# EAGLE board PCB (EAGLE 6.5.0)
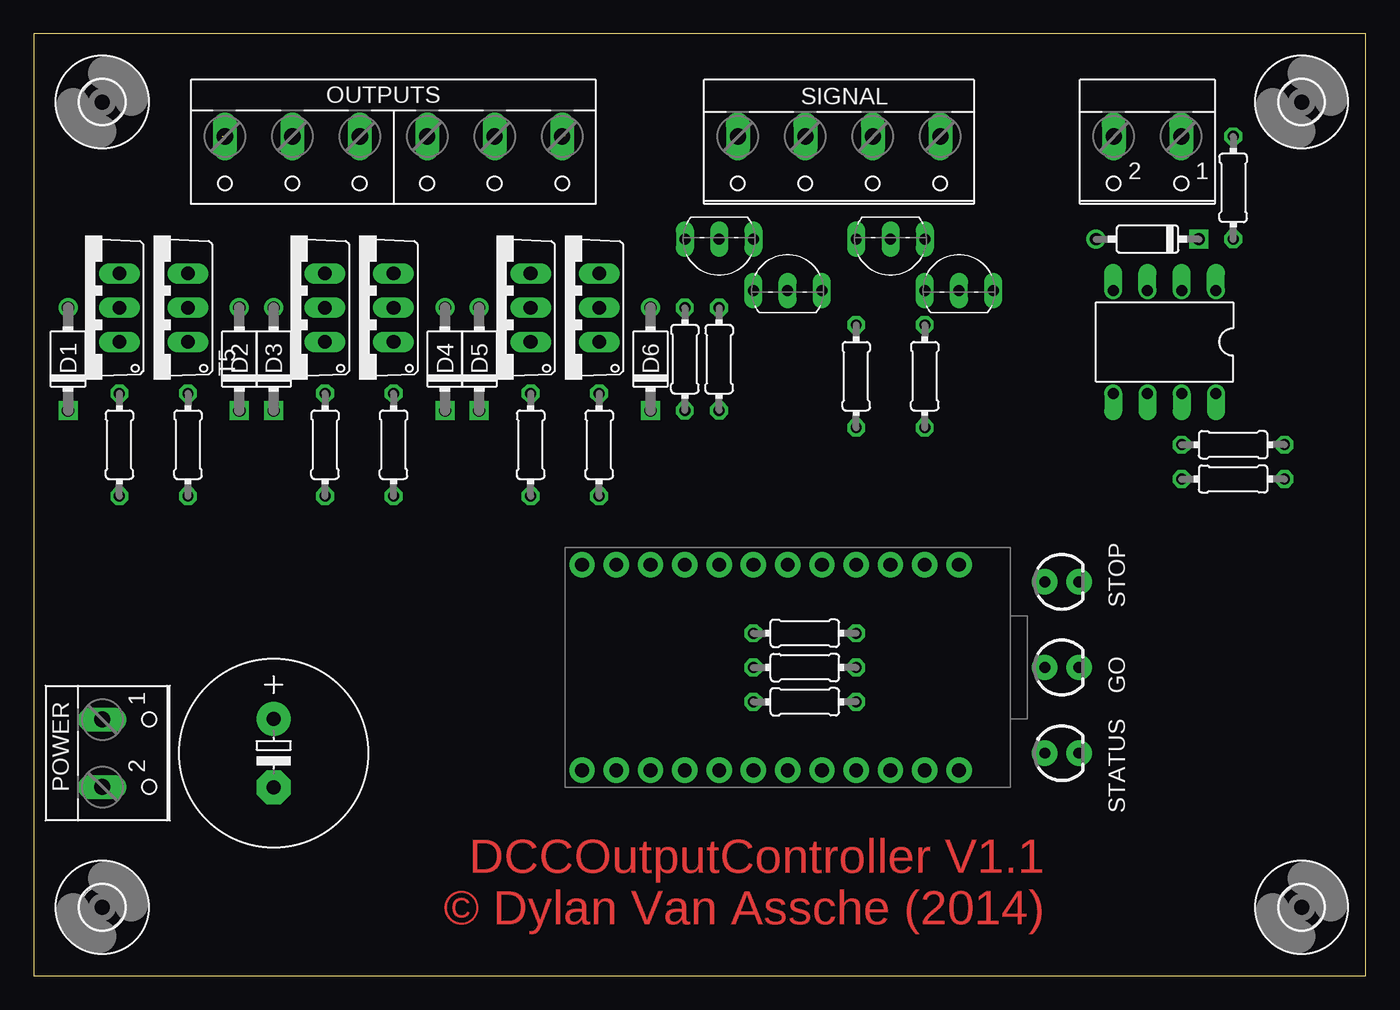
[diagram p0: board, top side]
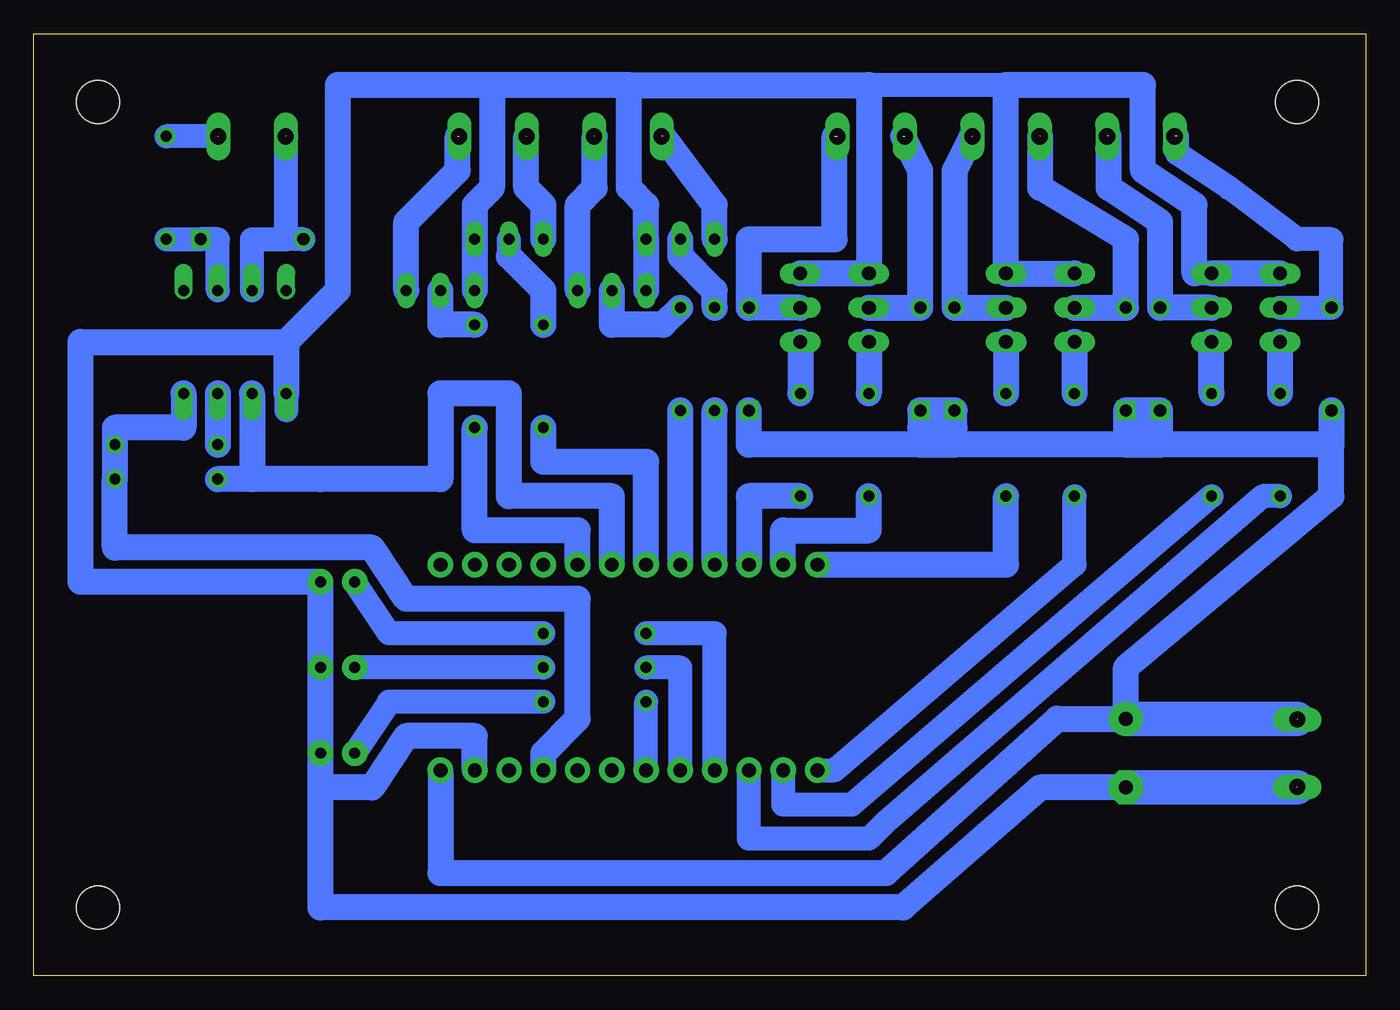
[diagram p1: board, bottom side, seen from below]

Size 98.73 x 69.84 mm. Coordinates in mm from the lower left corner, seen from the top.
Outline: 0,0 98.73,0 98.73,69.84 0,69.84 0,0
Copper layers (1*16): Top 0.035mm / dielectric 1.5mm / Bottom 0.035mm
Design rules "default": minimum track width 10mil, minimum drill 24mil, track to track 8mil, track to pad 8mil, pad to pad 8mil, via to via 8mil, smd to smd 8mil, copper to edge 40mil, drill to drill 8mil, minimum pad ring 10mil, minimum via ring 8mil, stop-mask expansion 4mil, vias tented up to drill 0mil, thermal gap 10mil

## Footprints (pad centres in the part's own frame; a part is rotated, then mirrored left to right if it is on the bottom)
E5-13 = drill 1.016 pad 2.54: + -2.54,0 | drill 1.016 pad 2.54 octagon: - 2.54,0
DO41-3 = drill 0.9: A 3.81,0 | drill 0.9 square: C -3.81,0
DO35-3 = drill 0.9: A 3.81,0 | drill 0.9 square: C -3.81,0
LED3MM = drill 0.813 pad 1.88: A -1.27,0; K 1.27,0
DIL08 = drill 0.813 offset: 1 -3.81,-3.81; 2 -1.27,-3.81; 3 1.27,-3.81; 4 3.81,-3.81; 5 3.81,3.81; 6 1.27,3.81; 7 -1.27,3.81; 8 -3.81,3.81
W237-6 = drill 1.194 long: 1 -12.5,-1.27; 2 -7.5,-1.27; 3 -2.5,-1.27; 4 2.5,-1.27; 5 7.5,-1.27; 6 12.5,-1.27
W237-102 = drill 1.194 long: 1 -2.5,-1.27; 2 2.5,-1.27
0204/7 = drill 0.813 octagon: 1 -3.81,0; 2 3.81,0
W237-4 = drill 1.194 long: 1 -7.5,-1.27; 2 -2.5,-1.27; 3 2.5,-1.27; 4 7.5,-1.27
TO220AV = drill 1.016 long: B -2.54,-2.54; C 0,-2.54; E 2.54,-2.54
TO92-EBC = drill 0.813 long: B 0,-1.27; C 2.54,-1.27; E -2.54,-1.27
ARDUINO_PRO_MICRO = drill 1.016 pad 1.88: 1 -7.62,12.7; 2 -7.62,10.16; 3 -7.62,7.62; 4 -7.62,5.08; 5 -7.62,2.54; 6 -7.62,0; 7 -7.62,-2.54; 8 -7.62,-5.08; 9 -7.62,-7.62; 10 -7.62,-10.16; 11 -7.62,-12.7; 12 -7.62,-15.24; 13 7.62,-15.24; 14 7.62,-12.7; 15 7.62,-10.16; 16 7.62,-7.62; 17 7.62,-5.08; 18 7.62,-2.54; 19 7.62,0; 20 7.62,2.54; 21 7.62,5.08; 22 7.62,7.62; 23 7.62,10.16; 24 7.62,12.7
3,2 = hole 3.2: 0,0

## Placement (x,y rotation side)
C1  1000uF  [E5-13]  17.78,16.51 270 top
D1  [DO41-3]  2.54,45.72 90 top
D2  [DO41-3]  15.24,45.72 90 top
D3  [DO41-3]  17.78,45.72 90 top
D4  [DO41-3]  30.48,45.72 90 top
D5  [DO41-3]  33.02,45.72 90 top
D6  [DO41-3]  45.72,45.72 90 top
D7  1N4148  [DO35-3]  82.55,54.61 180 top
GO  GREEN  [LED3MM]  76.2,22.86 0 top
OK1  6N137  [DIL08]  83.82,46.99 180 top
OUTPUTS  [W237-6]  26.67,60.96 180 top
POWER  [W237-102]  6.35,16.51 270 top
R1  1K  [0204/7]  66.04,44.45 270 top
R2  1K  [0204/7]  60.96,44.45 270 top
R3  1K  [0204/7]  50.8,45.72 270 top
R4  1K  [0204/7]  48.26,45.72 270 top
R5  1K  [0204/7]  41.91,39.37 270 top
R6  1K  [0204/7]  36.83,39.37 270 top
R7  1K  [0204/7]  26.67,39.37 270 top
R8  1K  [0204/7]  21.59,39.37 270 top
R9  1K  [0204/7]  11.43,39.37 270 top
R10  1K  [0204/7]  6.35,39.37 270 top
R11  1K  [0204/7]  88.9,58.42 90 top
R12  10K  [0204/7]  88.9,36.83 180 top
R13  10K  [0204/7]  88.9,39.37 180 top
R14  220  [0204/7]  57.15,20.32 0 top
R15  220  [0204/7]  57.15,22.86 0 top
R16  220  [0204/7]  57.15,25.4 0 top
SIGNAL  [W237-4]  59.69,60.96 180 top
STATUS  YELLOW  [LED3MM]  76.2,16.51 0 top
STOP  RED  [LED3MM]  76.2,29.21 0 top
T1  [TO220AV]  39.37,49.53 90 top
T2  [TO220AV]  34.29,49.53 90 top
T3  [TO220AV]  24.13,49.53 90 top
T4  [TO220AV]  19.05,49.53 90 top
T5  [TO220AV]  8.89,49.53 90 top
T6  [TO220AV]  3.81,49.53 90 top
T8  2N2222  [TO92-EBC]  55.88,52.07 0 top
T9  2N2222  [TO92-EBC]  63.5,53.34 180 top
T10  2N2222  [TO92-EBC]  68.58,52.07 0 top
T11  2N2222  [TO92-EBC]  50.8,53.34 180 top
U$1  ARDUINO_PRO_MICRO  [ARDUINO_PRO_MICRO]  55.88,22.86 270 top
U$2  [3,2]  5.08,64.77 0 top
U$3  [3,2]  5.08,5.08 0 top
U$4  [3,2]  93.98,5.08 0 top
U$5  [3,2]  93.98,64.77 0 top
X3  DCC  [W237-102]  82.55,60.96 180 top

## Library data of the parts
C1 R1-R10 R14-R16 = rcl
D1-D7 = gm-diodes
GO STATUS STOP = SparkFun-LED
OK1 = optocoupler; MPN: 6N137; OC_FARNELL: 1328376; OC_NEWARK: 52M1895
OUTPUTS SIGNAL = con-wago-500; OC_FARNELL: unknown; OC_NEWARK: unknown
POWER X3 = con-wago-500; MPN: 237-102; OC_FARNELL: unknown; OC_NEWARK: 70K9898
R11-R13 = resistor
T1-T6 = transistor
T8-T11 = transistor-neu-to92
U$1 = SparkFun-Boards
U$2-U$5 = holes

## Nets
GND: C1.- GO.K OK1.5 POWER.2 STATUS.K STOP.K T1.E T2.E T3.E T4.E T5.E T6.E T8.E T9.E T10.E T11.E U$1.23
N$1: R4.1 T11.B
N$2: R3.1 T8.B
N$3: R2.1 T9.B
N$4: R1.1 T10.B
N$5: SIGNAL.1 T10.C
N$6: SIGNAL.2 T9.C
N$7: SIGNAL.3 T8.C
N$8: SIGNAL.4 T11.C
N$9: D1.A OUTPUTS.6 T6.C
N$10: D2.A OUTPUTS.5 T5.C
N$11: D3.A OUTPUTS.4 T4.C
N$12: D4.A OUTPUTS.3 T3.C
N$13: D5.A OUTPUTS.2 T2.C
N$14: D6.A OUTPUTS.1 T1.C
N$15: R5.1 T1.B
N$16: R6.1 T2.B
N$17: R7.1 T3.B
N$18: R8.1 T4.B
N$19: R9.1 T5.B
N$20: R10.1 T6.B
N$21: OK1.6 R12.2 U$1.6
N$22: R1.2 U$1.5
N$23: R2.2 U$1.7
N$24: R3.2 U$1.8
N$25: R4.2 U$1.9
N$26: R5.2 U$1.10
N$27: R6.2 U$1.11
N$28: R7.2 U$1.12
N$29: R8.2 U$1.13
N$30: R9.2 U$1.14
N$31: R10.2 U$1.15
N$32: D7.C OK1.2 R11.1
N$33: D7.A OK1.3 X3.2
N$34: R11.2 X3.1
N$35: OK1.7 R13.2
N$36: OK1.8 R12.1 R13.1 U$1.21
N$37: R14.2 STATUS.A
N$38: GO.A R15.2
N$39: R16.2 STOP.A
N$41: R16.1 U$1.16
N$42: R15.1 U$1.17
N$43: R14.1 U$1.18
VCC: C1.+ D1.C D2.C D3.C D4.C D5.C D6.C POWER.1 U$1.24

## Tracks (layer width: path | path; a pad name or v marks a point on that pad's centre or on a via)
GND  (1 unrouted)
  Bottom 1.778: 26.67,66.04 36.83,66.04 | T5.E 12.7,52.07 | OK1.5 80.01,41.91
  Bottom 1.93: T1.E T2.E 36.83,66.04 54.61,66.04 | T4.E T3.E 26.67,66.04 16.51,66.04 16.51,59.69 12.7,57.15 12.7,52.07 | T6.E T5.E | T8.E T11.E 53.34,57.15 54.61,58.42 54.61,66.04 | T10.E T9.E 66.04,57.15 64.77,58.42 64.77,66.04 | 54.61,66.04 64.77,66.04 | 64.77,66.04 76.2,66.04 76.2,50.8 80.01,46.99 | 80.01,46.99 OK1.5 | U$1.23 66.04,17.78 71.12,17.78 73.66,13.97 77.47,13.97 | 77.47,13.97 STATUS.K GO.K STOP.K 95.25,29.21 95.25,46.99 80.01,46.99 | C1.- 24.13,13.97 34.29,5.08 77.47,5.08 77.47,13.97
  Bottom 2.54: 5.08,13.97 C1.-
N$1
  Bottom 1.93: R4.1 48.26,50.8 50.8,53.34 T11.B
N$2
  Bottom 1.93: R3.1 52.07,48.26 55.88,48.26 T8.B
N$3
  Bottom 1.778: 63.5,53.34 T9.B
  Bottom 1.93: R2.1 60.96,50.8 63.5,53.34
N$4
  Bottom 1.93: R1.1 68.58,48.26 T10.B
N$5  (1 unrouted)
  Bottom 1.93: T10.C 71.12,55.88 67.31,59.69 67.31,62.23
N$6  (1 unrouted)
  Bottom 1.93: T9.C 60.96,57.15 62.23,58.42 62.23,62.23
N$7  (1 unrouted)
  Bottom 1.93: T8.C 58.42,57.15 57.15,58.42 57.15,62.23
N$8  (1 unrouted)
  Bottom 1.93: T11.C 48.26,57.15 52.07,62.23
N$9  (1 unrouted)
  Bottom 1.778: T6.C D1.A 2.54,54.61 5.08,54.61 10.16,58.42 13.97,60.96 13.97,62.23
N$10  (1 unrouted)
  Bottom 1.93: T5.C D2.A 15.24,55.88 19.05,58.42 19.05,62.23
N$11  (1 unrouted)
  Bottom 1.93: T4.C D3.A 17.78,54.61 24.13,58.42 24.13,62.23
N$12  (1 unrouted)
  Bottom 1.93: 29.21,62.23 30.48,59.69 D4.A T3.C
N$13  (1 unrouted)
  Bottom 1.93: T2.C D5.A 33.02,59.69 34.29,62.23
N$14  (1 unrouted)
  Bottom 1.93: T1.C D6.A 45.72,54.61 39.37,54.61 39.37,62.23
N$15
  Bottom 1.93: T1.B R5.1
N$16
  Bottom 1.93: T2.B R6.1
N$17
  Bottom 1.93: T3.B R7.1
N$18
  Bottom 1.93: T4.B R8.1
N$19
  Bottom 1.93: R9.1 T5.B
N$20
  Bottom 1.93: R10.1 T6.B
N$21
  Bottom 1.93: OK1.6 82.55,36.83 | 82.55,36.83 R12.2 | 82.55,36.83 77.47,36.83 68.58,36.83 68.58,43.18 63.5,43.18 63.5,35.56 55.88,35.56 U$1.6
N$22
  Bottom 1.93: U$1.5 58.42,33.02 66.04,33.02 R1.2
N$23
  Bottom 1.93: U$1.7 53.34,38.1 60.96,38.1 R2.2
N$24
  Bottom 1.93: U$1.8 R3.2
N$25
  Bottom 1.93: U$1.9 R4.2
N$26
  Bottom 1.93: R5.2 45.72,35.56 U$1.10
N$27
  Bottom 1.93: U$1.11 43.18,33.02 36.83,33.02 R6.2
N$28
  Bottom 1.93: U$1.12 26.67,30.48 R7.2
N$29
  Bottom 1.778: U$1.13 39.37,15.24 21.59,30.48 R8.2
N$30
  Bottom 1.778: U$1.14 43.18,12.7 38.1,12.7 R9.2
N$31
  Bottom 1.778: R10.2 7.62,35.56 35.56,11.43 36.83,10.16 45.72,10.16 U$1.15
N$32
  Bottom 1.778: R11.1 D7.C 85.09,54.61 OK1.2
N$33  (1 unrouted)
  Bottom 1.778: D7.A 80.01,54.61 | 80.01,54.61 80.01,62.23 | OK1.3 82.55,54.61 80.01,54.61
N$34  (1 unrouted)
  Bottom 1.778: 85.09,62.23 R11.2
N$35
  Bottom 1.93: OK1.7 R13.2
N$36
  Bottom 1.93: OK1.8 87.63,40.64 92.71,40.64 R13.1 R12.1 92.71,31.75 73.66,31.75 71.12,27.94 58.42,27.94 58.42,19.05 60.96,16.51 U$1.21
N$37
  Bottom 1.778: R14.2 72.39,20.32 STATUS.A
N$38
  Bottom 1.778: R15.2 GO.A
N$39
  Bottom 1.778: R16.2 72.39,25.4 STOP.A
N$41
  Bottom 1.778: U$1.16 48.26,25.4 R16.1
N$42
  Bottom 1.778: U$1.17 50.8,22.86 R15.1
N$43
  Bottom 1.778: U$1.18 R14.1
VCC  (1 unrouted)
  Bottom 1.93: U$1.24 68.58,7.62 35.56,7.62 22.86,19.05 C1.+ 17.78,22.86 2.54,35.56 2.54,39.37 | D1.C 2.54,39.37 | 2.54,39.37 15.24,39.37 | 15.24,39.37 15.24,40.64 | 15.24,40.64 D2.C D3.C 17.78,40.64 | 17.78,40.64 17.78,39.37 | 17.78,39.37 15.24,39.37 | 17.78,39.37 30.48,39.37 | 30.48,39.37 30.48,40.64 | 30.48,40.64 D4.C D5.C 33.02,40.64 | 33.02,40.64 33.02,39.37 | 33.02,39.37 30.48,39.37 | 33.02,39.37 45.72,39.37 D6.C | 15.24,40.64 17.78,40.64 | 30.48,40.64 33.02,40.64
  Bottom 2.54: C1.+ 5.08,19.05

## Text on the board
Top: DCCOutputController V1.1 / © Dylan Van Assche (2014)